# Altium PCB PekeeCarteArduino2.PcbDoc
Units mil, origin at the board's own origin, x right, y up, seen from the top; angles counter-clockwise.
Board outline 3620 x 3410 mil, 2 copper layers (Top Layer, Bottom Layer); 28 components, 0 nets, 260 pads, 0 vias.
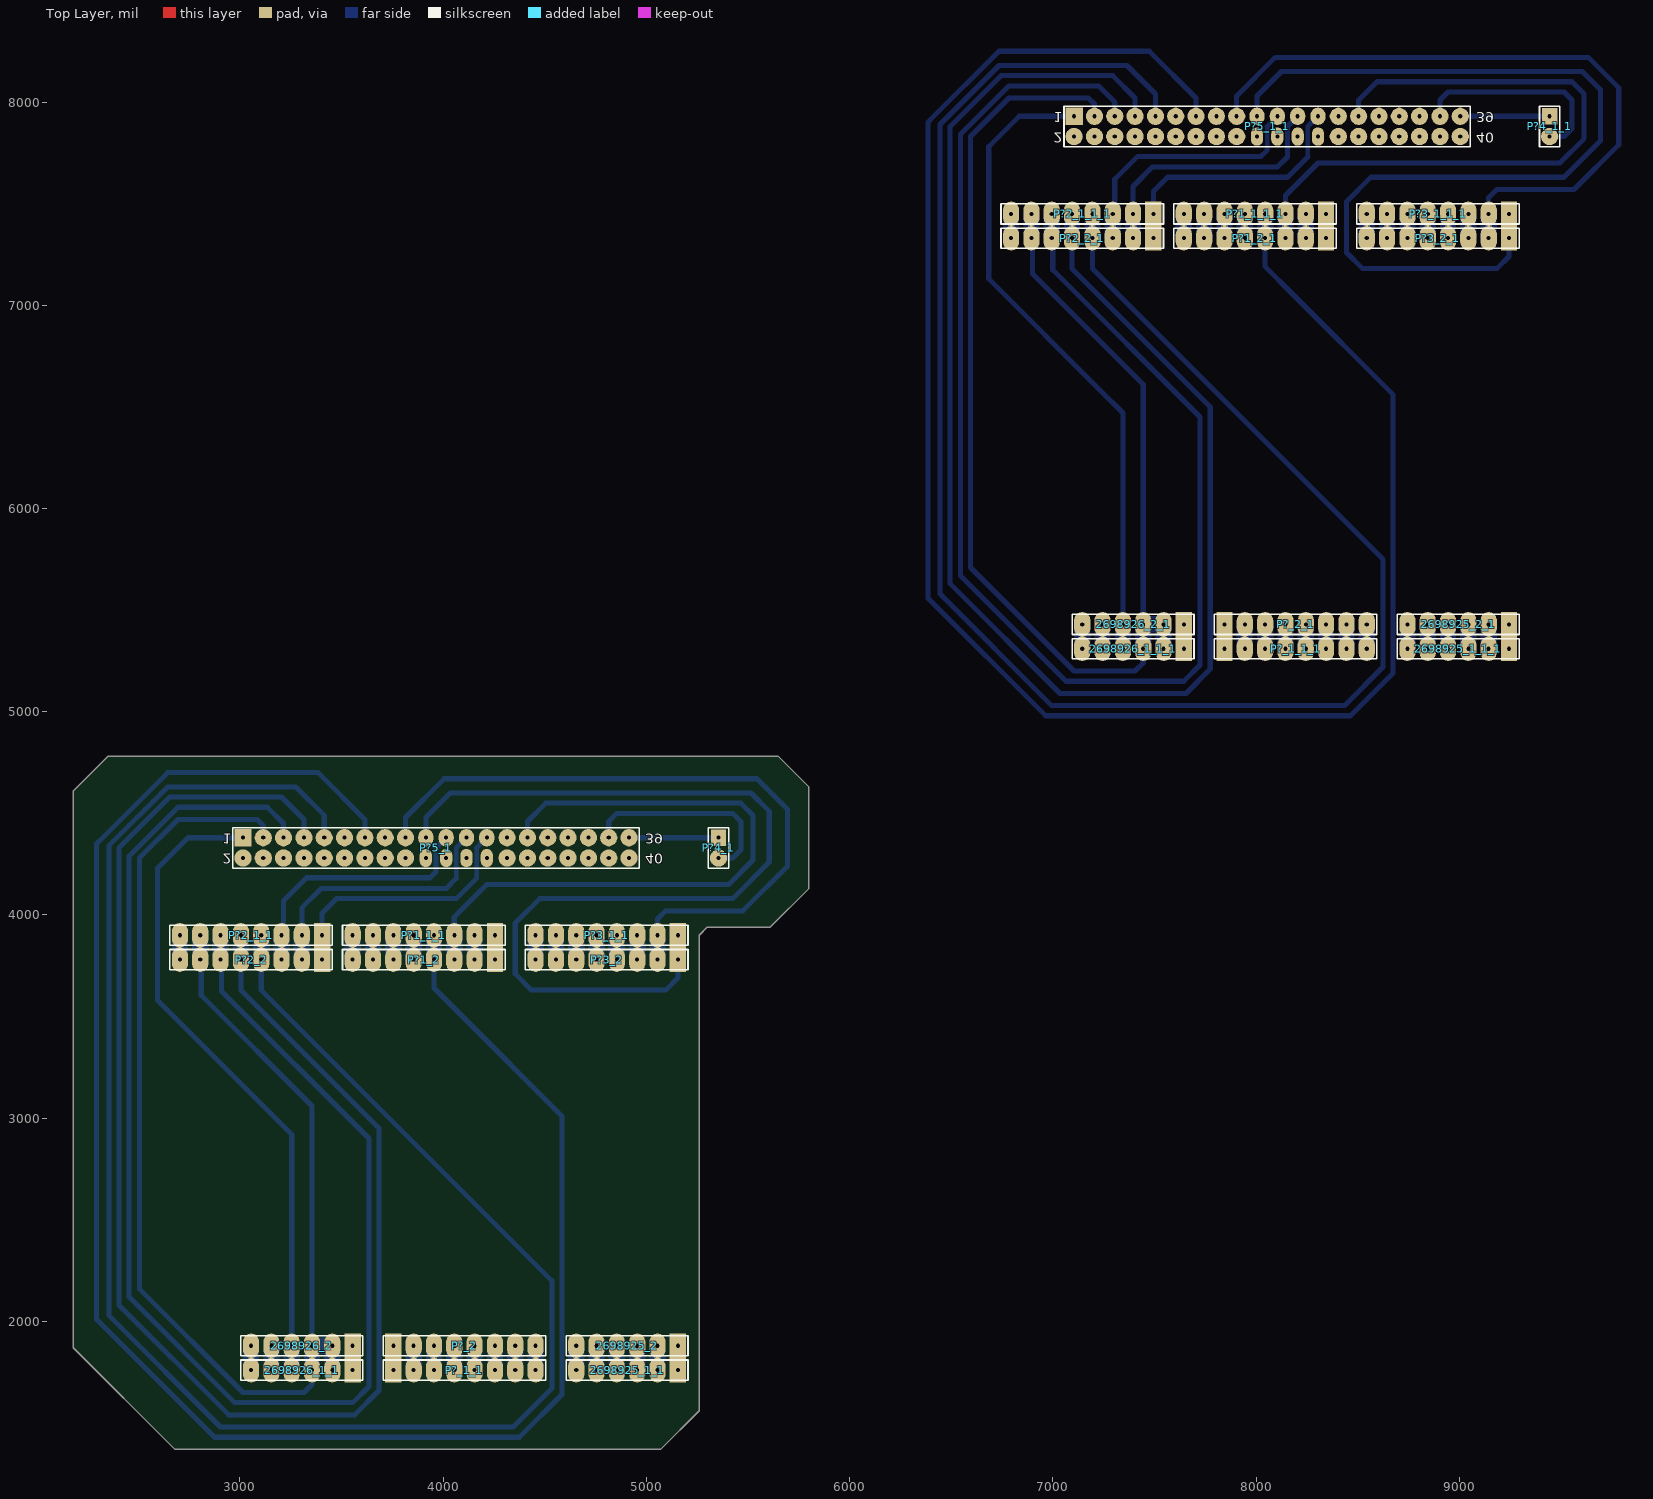
[diagram p0: Top Layer view]
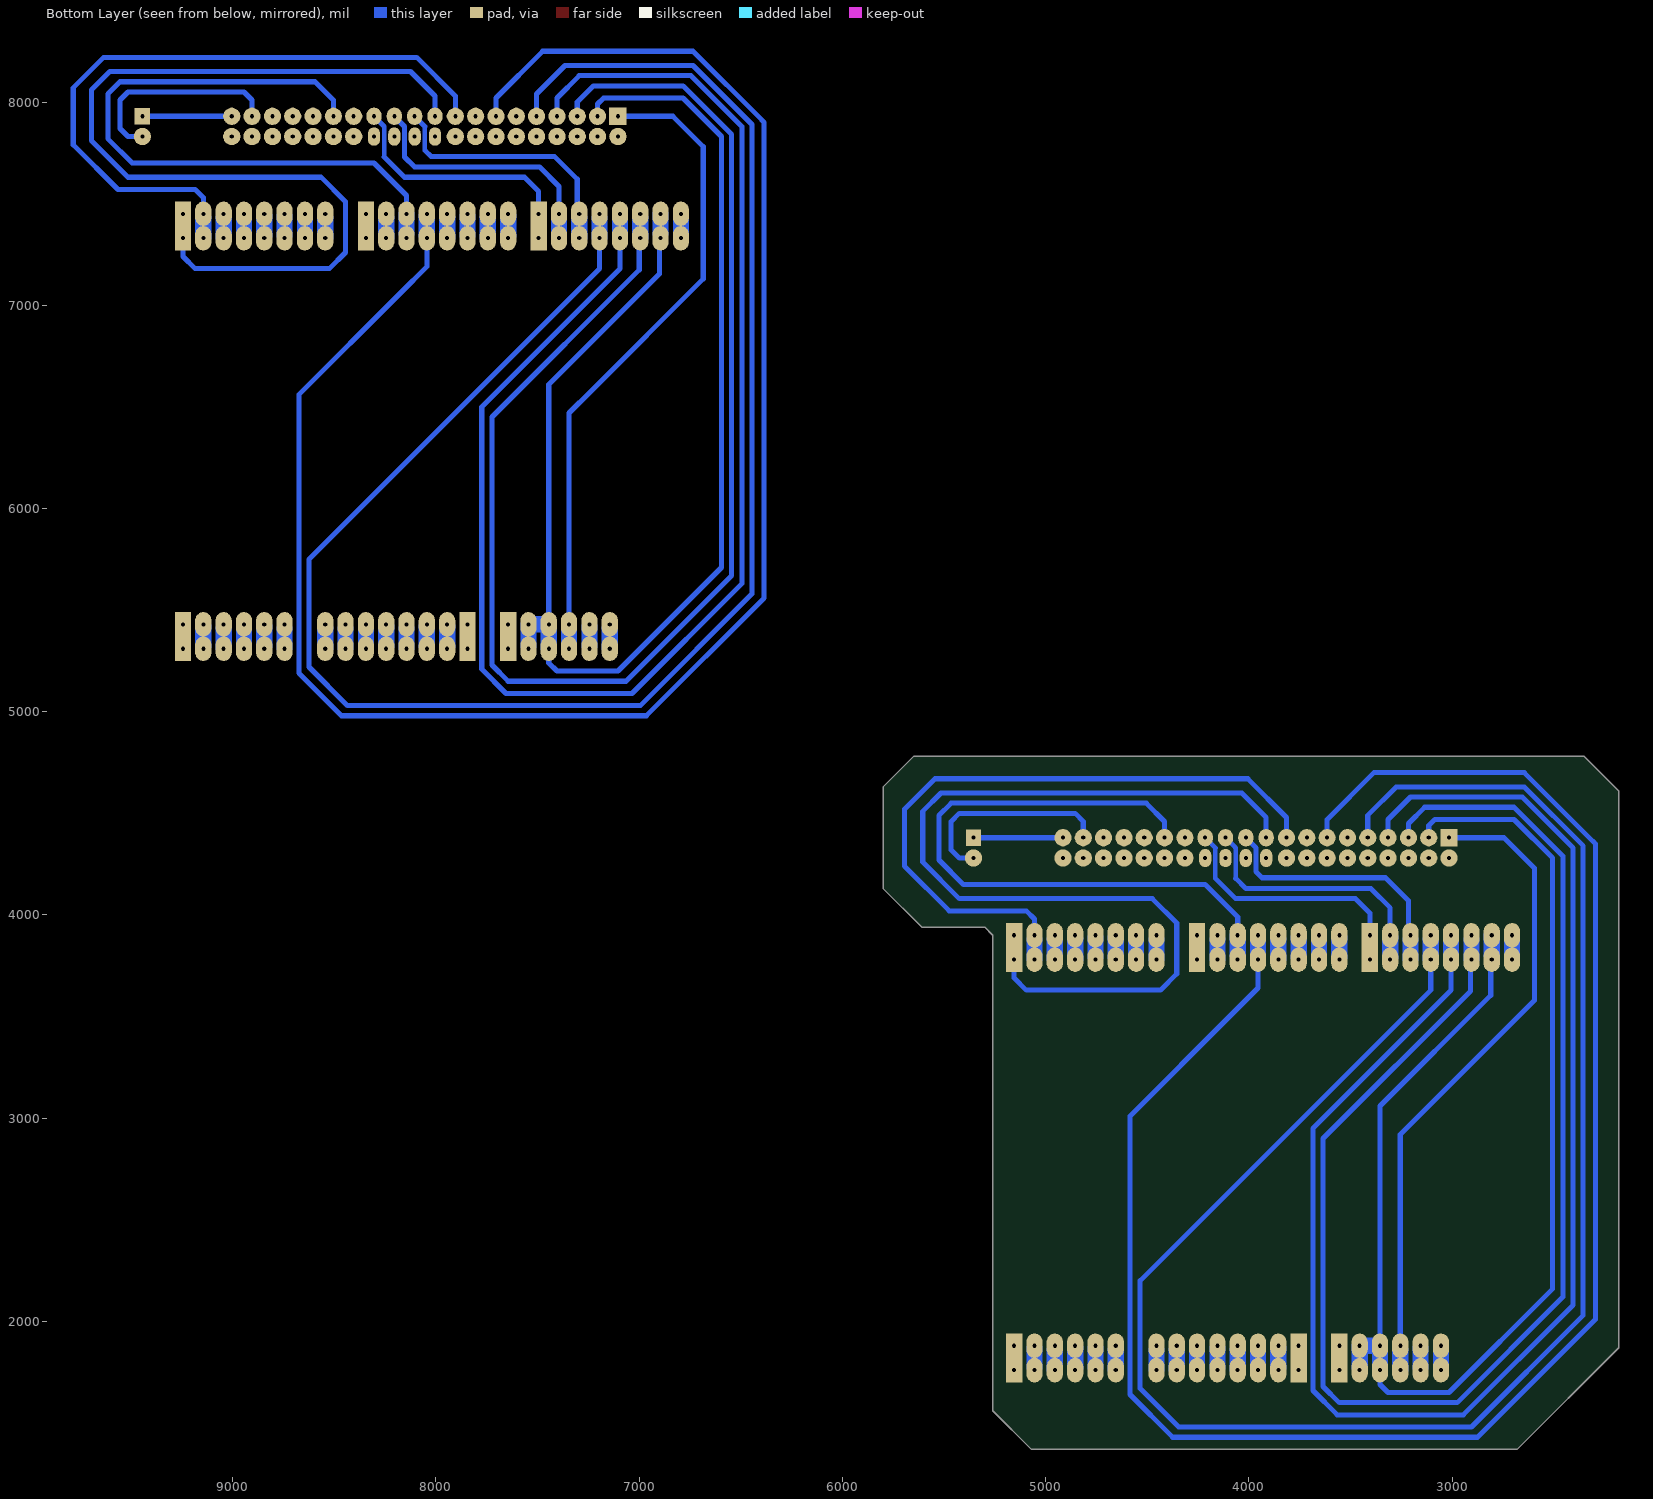
[diagram p1: Bottom Layer view, seen from below]

## Layer stack, top to bottom
Top Solder: solder mask 0.4, Solder Resist, Dk 3.5
Top Layer: signal copper 1.4
Dielectric 1: dielectric 12.6, FR-4, Dk 4.8
Bottom Layer: signal copper 1.4
Bottom Solder: solder mask 0.4, Solder Resist, Dk 3.5

## Board outline
2180,1870 2680,1370 5070,1370 5260,1560 5260,3900 5300,3940 5610,3940 5800,4130 5800,4630 5650,4780 2350,4780 2180,4610

## Design rules (kind name [scope] priority, off if disabled: settings)
AssemblyTestPointUsage [All] p1 off:
AssemblyTestpoint [All] p1 off: testpointundercomponent=TRUE minsize=40 maxsize=100 preferedsize=60 minholesize=0 maxholesize=40 preferedholesize=32 testpointgrid=1 usegrid=TRUE gridtolerance=0.01 allowsidetop=TRUE allowsidebottom=TRUE
Clearance [All] p1 off: gap=10
ComponentClearance [All] p1 off: gap=10 collisioncheckmode=3 verticalgap=10 showdistances=FALSE
DiffPairsRouting [All] p1 off: maxlimit=10 minlimit=10 mostfreqgap=10 toplayer_minwidth=15 toplayer_maxwidth=15 toplayer_prefwidth=15 bottomlayer_minwidth=15 bottomlayer_maxwidth=15 bottomlayer_prefwidth=15 maxuncoupledlength=500
FabricationTestPointUsage [All] p1 off: valid=0 allowmultiple=FALSE
FabricationTestpoint [All] p1 off: side=3 testpointundercomponent=TRUE minsize=40 maxsize=100 preferedsize=60 minholesize=0 maxholesize=40 preferedholesize=32 testpointgrid=1 allowsidetop=TRUE allowsidebottom=TRUE usegrid=TRUE gridtolerance=0.01
FanoutControl Fanout_BGA [IsBGA] p1 off: bgadir=Out bgaviamode=Centered fanoutstyle=Auto fanoutdirection=Alternating viagrid=1 // Fanout_BGA (Default Rule)
FanoutControl Fanout_LCC [IsLCC] p2 off: bgadir=Out bgaviamode=Centered fanoutstyle=Auto fanoutdirection=Alternating viagrid=1 // Fanout_LCC (Default Rule)
FanoutControl Fanout_SOIC [IsSOIC] p3 off: bgadir=Out bgaviamode=Centered fanoutstyle=Auto fanoutdirection=Alternating viagrid=1 // Fanout_SOIC (Default Rule)
FanoutControl Fanout_Small [(CompPinCount < 5)] p4 off: bgadir=Out bgaviamode=Centered fanoutstyle=Auto fanoutdirection=OutThenIn viagrid=1 // Fanout_Small (Default Rule)
FanoutControl Fanout_Default [All] p5 off: bgadir=Out bgaviamode=Centered fanoutstyle=Auto fanoutdirection=Alternating viagrid=1 // Fanout_Default (Default Rule)
Height [All] p1 off: minheight=0 maxheight=1000 prefheight=500
HoleSize [All] p1 off: absolutevalues=TRUE maxlimit=100 minlimit=1 maxpercent=80.000 minpercent=20.000
HoleToHoleClearance [All] p1 off: gap=10 allowstackedmicrovias=TRUE
LayerPairs [All] p1 off: enforce=TRUE
MinimumSolderMaskSliver [All] p1 off: minsoldermaskwidth=10
NetAntennae [All] p1 off: netantennaetolerance=0
PasteMaskExpansion [All] p1 off: expansion=0
PlaneClearance [All] p1 off: clearance=20
PlaneConnect [All] p1 off: planeconnectstyle=Relief reliefexpansion=20 reliefentries=4 reliefconductorwidth=10 reliefairgap=10
PolygonConnect [All] p1 off: connectstyle=Relief reliefconductorwidth=10 reliefentries=4 polygonreliefangle="90 Angle" airgapwidth=10
RoutingCorners [All] p1 off: cornerstyle=45-Degree minsetback=100 maxsetback=100
RoutingLayers [All] p1 off: top layer_v5=TRUE bottom layer_v5=TRUE
RoutingPriority [All] p1 off: routingpriority=0
RoutingTopology [All] p1 off: topology=Shortest
RoutingVias [All] p1 off: holewidth=28 width=50 viastyle="Through Hole" minholewidth=28 minwidth=50 maxholewidth=28 maxwidth=50
ShortCircuit [All] p1 off: allowed=FALSE
SilkToBoardRegionClearance [All] p1 off:
SilkToSilkClearance [All] p1 off: silktosilkclearance=10
SilkToSolderMaskClearance [IsPad] p1 off: minsilkscreentomaskgap=10 clearancetoexposedcopper=TRUE
SolderMaskExpansion [All] p1 off: expansion=4
UnRoutedNet [All] p1 off:
Width [All] p1 off: maxlimit=10 minlimit=10 preferedwidth=10

## Components (designator, comment, footprint, x,y, rotation, side; value= is the part's Value field where it differs from the comment)
2698925_1_1 "Header 6" HDR1X6 5155,1760 r180 top (schematic designator 2698925)
2698925_1_1_1 "Header 6" HDR1X6 9245,5310 r180 top (schematic designator 2698925)
2698925_2 "Header 6" HDR1X6 5155,1880 r180 top (schematic designator 2698925)
2698925_2_1 "Header 6" HDR1X6 9245,5430 r180 top (schematic designator 2698925)
2698926_1_1 "Header 6" HDR1X6 3555,1760 r180 top (schematic designator 2698925)
2698926_1_1_1 "Header 6" HDR1X6 7645,5310 r180 top (schematic designator 2698925)
2698926_2 "Header 6" HDR1X6 3555,1880 r180 top (schematic designator 2698925)
2698926_2_1 "Header 6" HDR1X6 7645,5430 r180 top (schematic designator 2698925)
P?1_1_1 "Header 8" HDR1X8 4255,3900 r180 top (schematic designator P?)
P?1_1_1_1 "Header 8" HDR1X8 8345,7450 r180 top (schematic designator P?)
P?1_2 "Header 8" HDR1X8 4255,3780 r180 top (schematic designator P?)
P?1_2_1 "Header 8" HDR1X8 8345,7330 r180 top (schematic designator P?)
P?2_1_1 "Header 8" HDR1X8 3405,3900 r180 top (schematic designator P?)
P?2_1_1_1 "Header 8" HDR1X8 7495,7450 r180 top (schematic designator P?)
P?2_2 "Header 8" HDR1X8 3405,3780 r180 top (schematic designator P?)
P?2_2_1 "Header 8" HDR1X8 7495,7330 r180 top (schematic designator P?)
P?3_1_1 "Header 8" HDR1X8 5155,3900 r180 top (schematic designator P?)
P?3_1_1_1 "Header 8" HDR1X8 9245,7450 r180 top (schematic designator P?)
P?3_2 "Header 8" HDR1X8 5155,3780 r180 top (schematic designator P?)
P?3_2_1 "Header 8" HDR1X8 9245,7330 r180 top (schematic designator P?)
P?4_1 "Header 2" HDR1X2 5355,4380 r270 top (schematic designator P?)
P?4_1_1 "Header 2" HDR1X2 9445,7930 r270 top (schematic designator P?)
P?5_1 "Header 20X2" HDR2X20 3015,4380 r0 top (schematic designator P?)
P?5_1_1 "Header 20X2" HDR2X20 7105,7930 r0 top (schematic designator P?)
P?_1_1 "Header 8" HDR1X8 3755,1760 r0 top (schematic designator P?)
P?_1_1_1 "Header 8" HDR1X8 7845,5310 r0 top (schematic designator P?)
P?_2 "Header 8" HDR1X8 3755,1880 r0 top (schematic designator P?)
P?_2_1 "Header 8" HDR1X8 7845,5430 r0 top (schematic designator P?)

## Footprints (in the part's own frame and the unit in brackets; to place one, negate y for a bottom-side part, rotate by r counter-clockwise, add the part's x,y. Pads: shape width x height; smd on the part's side, far side on the other; paste and mask are expansions set on the pad)
HDR1X2 [mil] "Connector; Header; 2 Position"
  rect 80x75 hole 20: 1(0,0)
  round 85 hole 20 unplated: 2(100,0)
  silkscreen extent -50,-50 150,50
HDR1X6 [mil] "Connector; Header; 6 Position"
  rect 80x120 hole 20: 1(0,0)
  oval 80x120 hole 20: 2(100,0) 3(200,0) 4(300,0) 5(400,0) 6(500,0)
  silkscreen extent -50,-50 550,50
HDR1X8 [mil] "Connector; Header; 8 Position"
  rect 80x120 hole 20: 1(0,0)
  oval 80x120 hole 20: 2(100,0) 3(200,0) 4(300,0) 5(400,0) 6(500,0) 7(600,0) 8(700,0)
  silkscreen extent -50,-50 750,50
HDR2X20 [mil] "Connector; Header; 20x2 Position"
  rect 85x85 hole 20 unplated: 1(0,0)
  round 85 hole 20 unplated: 2(0,-100) 3(100,0) 4(100,-100) 5(200,0) 6(200,-100) 7(300,0) 8(300,-100) 9(400,0) 10(400,-100) 11(500,0) 12(500,-100) 13(600,0) 14(600,-100) 15(700,0) 16(700,-100) 17(800,0) 18(800,-100) 27(1300,0) 28(1300,-100) 29(1400,0) 30(1400,-100) 31(1500,0) 32(1500,-100) 33(1600,0) 34(1600,-100) 35(1700,0) 36(1700,-100) 37(1800,0) 38(1800,-100) 39(1900,0) 40(1900,-100)
  oval 75x85 hole 20: 19(900,0) 21(1000,0) 23(1100,0) 25(1200,0)
  oval 60x90 hole 20: 20(900,-100) 22(1000,-100) 24(1100,-100) 26(1200,-100)
  silkscreen extent -50,-150 1950,50

## Part data
2698925_1_1 2698925_1_1_1 2698925_2 2698925_2_1 2698926_1_1 2698926_1_1_1 2698926_2 2698926_2_1: "Header, 6-Pin"
P?1_1_1 P?1_1_1_1 P?1_2 P?1_2_1 P?2_1_1 P?2_1_1_1 P?2_2 P?2_2_1 P?3_1_1 P?3_1_1_1 P?3_2 P?3_2_1 P?_1_1 P?_1_1_1 P?_2 P?_2_1: "Header, 8-Pin"
P?4_1 P?4_1_1: "Header, 2-Pin"
P?5_1 P?5_1_1: "Header, 20-Pin, Dual row"

## Nets (pads, with @x,y where several pads share a name; then routed paths per layer and width w, separated by ;. In a path a pad name is that pad's centre, name@x,y a point inside that pad or via, vN(x,y) a via of type N, cw(c..) or ccw(c..) an arc to the next point about the centre after c; other vN are vias at no path point)
pads on no net: 2698925_1_1.1 2698925_1_1.2 2698925_1_1.3 2698925_1_1.4 2698925_1_1.5 2698925_1_1.6 2698925_1_1_1.1 2698925_1_1_1.2 2698925_1_1_1.3 2698925_1_1_1.4 2698925_1_1_1.5 2698925_1_1_1.6 2698925_2.1 2698925_2.2 2698925_2.3 2698925_2.4 2698925_2.5 2698925_2.6 2698925_2_1.1 2698925_2_1.2 2698925_2_1.3 2698925_2_1.4 2698925_2_1.5 2698925_2_1.6 2698926_1_1.1 2698926_1_1.2 2698926_1_1.3 2698926_1_1.4 2698926_1_1.5 2698926_1_1.6 2698926_1_1_1.1 2698926_1_1_1.2 2698926_1_1_1.3 2698926_1_1_1.4 2698926_1_1_1.5 2698926_1_1_1.6 2698926_2.1 2698926_2.2 2698926_2.3 2698926_2.4 2698926_2.5 2698926_2.6 2698926_2_1.1 2698926_2_1.2 2698926_2_1.3 2698926_2_1.4 2698926_2_1.5 2698926_2_1.6 P?1_1_1.1 P?1_1_1.2 P?1_1_1.3 P?1_1_1.4 P?1_1_1.5 P?1_1_1.6 P?1_1_1.7 P?1_1_1.8 P?1_1_1_1.1 P?1_1_1_1.2 P?1_1_1_1.3 P?1_1_1_1.4 P?1_1_1_1.5 P?1_1_1_1.6 P?1_1_1_1.7 P?1_1_1_1.8 P?1_2.1 P?1_2.2 P?1_2.3 P?1_2.4 P?1_2.5 P?1_2.6 P?1_2.7 P?1_2.8 P?1_2_1.1 P?1_2_1.2 P?1_2_1.3 P?1_2_1.4 P?1_2_1.5 P?1_2_1.6 P?1_2_1.7 P?1_2_1.8 P?2_1_1.1 P?2_1_1.2 P?2_1_1.3 P?2_1_1.4 P?2_1_1.5 P?2_1_1.6 P?2_1_1.7 P?2_1_1.8 P?2_1_1_1.1 P?2_1_1_1.2 P?2_1_1_1.3 P?2_1_1_1.4 P?2_1_1_1.5 P?2_1_1_1.6 P?2_1_1_1.7 P?2_1_1_1.8 P?2_2.1 P?2_2.2 P?2_2.3 P?2_2.4 P?2_2.5 P?2_2.6 P?2_2.7 P?2_2.8 P?2_2_1.1 P?2_2_1.2 P?2_2_1.3 P?2_2_1.4 P?2_2_1.5 P?2_2_1.6 P?2_2_1.7 P?2_2_1.8 P?3_1_1.1 P?3_1_1.2 P?3_1_1.3 P?3_1_1.4 P?3_1_1.5 P?3_1_1.6 P?3_1_1.7 P?3_1_1.8 P?3_1_1_1.1 P?3_1_1_1.2 P?3_1_1_1.3 P?3_1_1_1.4 P?3_1_1_1.5 P?3_1_1_1.6 P?3_1_1_1.7 P?3_1_1_1.8 P?3_2.1 P?3_2.2 P?3_2.3 P?3_2.4 P?3_2.5 P?3_2.6 P?3_2.7 P?3_2.8 P?3_2_1.1 P?3_2_1.2 P?3_2_1.3 P?3_2_1.4 P?3_2_1.5 P?3_2_1.6 P?3_2_1.7 P?3_2_1.8 P?4_1.1 P?4_1.2 P?4_1_1.1 P?4_1_1.2 P?5_1.1 P?5_1.2 P?5_1.3 P?5_1.4 P?5_1.5 P?5_1.6 P?5_1.7 P?5_1.8 P?5_1.9 P?5_1.10 P?5_1.11 P?5_1.12 P?5_1.13 P?5_1.14 P?5_1.15 P?5_1.16 P?5_1.17 P?5_1.18 P?5_1.19 P?5_1.20 P?5_1.21 P?5_1.22 P?5_1.23 P?5_1.24 P?5_1.25 P?5_1.26 P?5_1.27 P?5_1.28 P?5_1.29 P?5_1.30 P?5_1.31 P?5_1.32 P?5_1.33 P?5_1.34 P?5_1.35 P?5_1.36 P?5_1.37 P?5_1.38 P?5_1.39 P?5_1.40 P?5_1_1.1 P?5_1_1.2 P?5_1_1.3 P?5_1_1.4 P?5_1_1.5 P?5_1_1.6 P?5_1_1.7 P?5_1_1.8 P?5_1_1.9 P?5_1_1.10 P?5_1_1.11 P?5_1_1.12 P?5_1_1.13 P?5_1_1.14 P?5_1_1.15 P?5_1_1.16 P?5_1_1.17 P?5_1_1.18 P?5_1_1.19 P?5_1_1.20 P?5_1_1.21 P?5_1_1.22 P?5_1_1.23 P?5_1_1.24 P?5_1_1.25 P?5_1_1.26 P?5_1_1.27 P?5_1_1.28 P?5_1_1.29 P?5_1_1.30 P?5_1_1.31 P?5_1_1.32 P?5_1_1.33 P?5_1_1.34 P?5_1_1.35 P?5_1_1.36 P?5_1_1.37 P?5_1_1.38 P?5_1_1.39 P?5_1_1.40 P?_1_1.1 P?_1_1.2 P?_1_1.3 P?_1_1.4 P?_1_1.5 P?_1_1.6 P?_1_1.7 P?_1_1.8 P?_1_1_1.1 P?_1_1_1.2 P?_1_1_1.3 P?_1_1_1.4 P?_1_1_1.5 P?_1_1_1.6 P?_1_1_1.7 P?_1_1_1.8 P?_2.1 P?_2.2 P?_2.3 P?_2.4 P?_2.5 P?_2.6 P?_2.7 P?_2.8 P?_2_1.1 P?_2_1.2 P?_2_1.3 P?_2_1.4 P?_2_1.5 P?_2_1.6 P?_2_1.7 P?_2_1.8
copper on no net: | length 130913.2
  Bottom Layer w23: 3965,4213.03 3965,4330 ; 4065,4180 4065,4330 ; 4165,4180 4165,4330 ; 8055,7763.03 8055,7880 ; 8155,7730 8155,7880 ; 8255,7730 8255,7880
  Bottom Layer w25: 2810,3780 2810,3605 3355,3060 3355,1880 ; 2886.25,3870 2910,3846.25 2910,3717.5 2910,3625 3635,2900 3635,1680 3555,1600 2975,1600 2455,2120 2455,4290 2695,4530 3135,4530 3215,4450 3215,4380 ; 2985,3870 3005,3850 3005,3630 3685,2950 3685,2930 3685,1660 3565,1540 2945,1540 2405,2080 2405,4330 2655,4580 2705,4580 3205,4580 3315,4470 3315,4380 ; 3015,4380 2745,4380 2595,4230 2595,3580 3145,3030 3255,2920 3255,1942.5 ; 3045,1870 3055,1880 3055,1832.5 3055,1800 ; 3085,3870 3085,3830 3105,3810 3105,3630 4535,2200 4535,1670 4345,1480 2905,1480 2355,2030 2355,4340 2645,4630 3275,4630 3415,4490 3415,4380 ; 3115,4380 3115,4440 3085,4470 2695,4470 2505,4280 2505,2160 3015,1650 3315,1650 3355,1690 3355,1800 3355,1880 ; 3155,1800 3155,1847.5 3155,1880 ; 3205,3780 3205,3830 3215,3840 3215,4070 3328.03,4183.03 3935,4183.03 3965,4213.03 ; 3236.59,1898.41 3255,1880 ; 3245,1890 3255,1880 ; 3255,1780 3255,1880 ; 3255,1870 3255,1940 ; 3285,3780 3285,3810 ; 3305,3835 3305,4035 3400,4130 4015,4130 4065,4180 ; 3405,3780 3405,3800 3405,4010 3475,4080 4065,4080 4165,4180 ; 3455,1790 3455,1880 ; 3455,1870 3445,1880 3355,1880 ; 3555,3770 3555,3860 ; 3615,4380 3615,4470 3385,4700 2645,4700 2305,4360 2295,4350 2295,2010 2875,1430 4375,1430 4585,1640 4585,3010 4085,3510 3955,3640 3955,3780 3955,3860 ; 3655,3770 3655,3860 ; 3755,3780 3755,3860 ; 3815,4380 3815,4480 4005,4670 4835,4670 ; 3855,1800 3855,1847.5 3855,1880 ; 3855,3770 3855,3860 ; 3915,4380 3915,4480 4035,4600 4845,4600 ; 3929.62,3754.62 3934.25,3750 ; 3955,1800 3955,1847.5 3955,1880 ; 3965,4330 4015,4380 4015,4410 ; 4055,1800 4055,1847.5 4055,1880 ; 4055,3770 4055,3860 4055,3930 ; 4055,3912.5 4055,3990 4215,4150 4845,4150 ; 4065,4330 4115,4380 ; 4155,1800 4155,1847.5 4155,1880 ; 4155,3762.18 4155,3860 ; 4165,4330 4215,4380 4215,4390 ; 4255,1800 4255,1847.5 4255,1880 ; 4355,1800 4355,1847.5 4355,1880 ; 4415,4380 4415,4460 4505,4550 4845,4550 ; 4455,1800 4455,1847.5 4455,1880 ; 4455,3770 4455,3860 ; 4555,3780 4555,3860 ; 4655,1800 4655,1847.5 4655,1880 ; 4655,3762.18 4655,3860 ; 4755,1800 4755,1847.5 4755,1880 ; 4755,3770 4755,3860 ; 4755,4150 5405,4150 5525,4270 5525,4490 5465,4550 4765,4550 ; 4755,4670 5545,4670 5695,4520 5695,4240 5475,4020 5095,4020 5055,3980 5055,3912.5 ; 4765,4600 5515,4600 5605,4510 5605,4260 5425,4080 4825,4080 ; 4815,4380 4815,4460 4855,4500 5425,4500 5465,4460 5465,4320 5425,4280 5355,4280 ; 4855,1800 4855,1847.5 4855,1880 ; 4855,3770 4855,3860 ; 4895,4380 5355,4380 ; 4905,4080 4475,4080 4355,3960 4355,3710 4435,3630 5095,3630 5155,3690 5155,3780 ; 4915,4380 4975,4380 ; 4955,1800 4955,1847.5 4955,1880 ; 4955,3770 4955,3860 ; 5055,1800 5055,1847.5 5055,1880 ; 5055,3770 5055,3860 5055,3960 ; 6900,7330 6900,7155 7445,6610 7445,5430 ; 6976.25,7420 7000,7396.25 7000,7267.5 7000,7175 7725,6450 7725,5230 7645,5150 7065,5150 6545,5670 6545,7840 6785,8080 7225,8080 7305,8000 7305,7930 ; 7075,7420 7095,7400 7095,7180 7775,6500 7775,6480 7775,5210 7655,5090 7035,5090 6495,5630 6495,7880 6745,8130 6795,8130 7295,8130 7405,8020 7405,7930 ; 7105,7930 6835,7930 6685,7780 6685,7130 7235,6580 7345,6470 7345,5492.5 ; 7135,5420 7145,5430 7145,5382.5 7145,5350 ; 7175,7420 7175,7380 7195,7360 7195,7180 8625,5750 8625,5220 8435,5030 6995,5030 6445,5580 6445,7890 6735,8180 7365,8180 7505,8040 7505,7930 ; 7205,7930 7205,7990 7175,8020 6785,8020 6595,7830 6595,5710 7105,5200 7405,5200 7445,5240 7445,5350 7445,5430 ; 7245,5350 7245,5397.5 7245,5430 ; 7295,7330 7295,7380 7305,7390 7305,7620 7418.03,7733.03 8025,7733.03 8055,7763.03 ; 7326.59,5448.41 7345,5430 ; 7335,5440 7345,5430 ; 7345,5330 7345,5430 ; 7345,5420 7345,5490 ; 7375,7330 7375,7360 ; 7395,7385 7395,7585 7490,7680 8105,7680 8155,7730 ; 7495,7330 7495,7350 7495,7560 7565,7630 8155,7630 8255,7730 ; 7545,5340 7545,5430 ; 7545,5420 7535,5430 7445,5430 ; 7645,7320 7645,7410 ; 7705,7930 7705,8020 7475,8250 6735,8250 6395,7910 6385,7900 6385,5560 6965,4980 8465,4980 8675,5190 8675,6560 8175,7060 8045,7190 8045,7330 8045,7410 ; 7745,7320 7745,7410 ; 7845,7330 7845,7410 ; 7905,7930 7905,8030 8095,8220 8925,8220 ; 7945,5350 7945,5397.5 7945,5430 ; 7945,7320 7945,7410 ; 8005,7930 8005,8030 8125,8150 8935,8150 ; 8019.62,7304.62 8024.25,7300 ; 8045,5350 8045,5397.5 8045,5430 ; 8055,7880 8105,7930 8105,7960 ; 8145,5350 8145,5397.5 8145,5430 ; 8145,7320 8145,7410 8145,7480 ; 8145,7462.5 8145,7540 8305,7700 8935,7700 ; 8155,7880 8205,7930 ; 8245,5350 8245,5397.5 8245,5430 ; 8245,7312.18 8245,7410 ; 8255,7880 8305,7930 8305,7940 ; 8345,5350 8345,5397.5 8345,5430 ; 8445,5350 8445,5397.5 8445,5430 ; 8505,7930 8505,8010 8595,8100 8935,8100 ; 8545,5350 8545,5397.5 8545,5430 ; 8545,7320 8545,7410 ; 8645,7330 8645,7410 ; 8745,5350 8745,5397.5 8745,5430 ; 8745,7312.18 8745,7410 ; 8845,5350 8845,5397.5 8845,5430 ; 8845,7320 8845,7410 ; 8845,7700 9495,7700 9615,7820 9615,8040 9555,8100 8855,8100 ; 8845,8220 9635,8220 9785,8070 9785,7790 9565,7570 9185,7570 9145,7530 9145,7462.5 ; 8855,8150 9605,8150 9695,8060 9695,7810 9515,7630 8915,7630 ; 8905,7930 8905,8010 8945,8050 9515,8050 9555,8010 9555,7870 9515,7830 9445,7830 ; 8945,5350 8945,5397.5 8945,5430 ; 8945,7320 8945,7410 ; 8985,7930 9445,7930 ; 8995,7630 8565,7630 8445,7510 8445,7260 8525,7180 9185,7180 9245,7240 9245,7330 ; 9005,7930 9065,7930 ; 9045,5350 9045,5397.5 9045,5430 ; 9045,7320 9045,7410 ; 9145,5350 9145,5397.5 9145,5430 ; 9145,7320 9145,7410 9145,7510
  Bottom Layer w80: 2705,3792.18 2705,3890 ; 2805,3802.18 2805,3900 ; 2905,3782.18 2905,3880 ; 3005,3782.18 3005,3880 ; 3055,1762.17 3055,1860 ; 3105,3782.18 3105,3880 ; 3155,1772.17 3155,1870 ; 3205,3782.18 3205,3880 ; 3255,1762.17 3255,1860 ; 3305,3792.18 3305,3890 ; 3355,1762.17 3355,1860 ; 3355,1880 3455,1880 ; 3455,1772.17 3455,1870 ; 3555,3792.18 3555,3890 ; 3655,3782.18 3655,3880 ; 3755,3792.18 3755,3890 ; 3855,1772.17 3855,1870 ; 3855,3782.18 3855,3880 ; 3955,1772.17 3955,1870 ; 3955,3792.18 3955,3890 ; 4055,1762.17 4055,1860 ; 4055,3802.18 4055,3900 ; 4155,1772.17 4155,1870 ; 4155,3782.18 4155,3880 ; 4255,1772.17 4255,1870 ; 4355,1762.17 4355,1860 ; 4455,1762.17 4455,1860 ; 4455,3782.18 4455,3880 ; 4555,3792.18 4555,3890 ; 4655,1762.17 4655,1860 ; 4655,3792.18 4655,3890 ; 4755,1772.17 4755,1870 ; 4755,3792.18 4755,3890 ; 4855,1772.17 4855,1870 ; 4855,3782.18 4855,3880 ; 4955,1762.17 4955,1860 ; 4955,3782.18 4955,3880 ; 5055,1772.17 5055,1870 ; 5055,3782.18 5055,3880 ; 6795,7342.18 6795,7440 ; 6895,7352.18 6895,7450 ; 6995,7332.18 6995,7430 ; 7095,7332.18 7095,7430 ; 7145,5312.18 7145,5410 ; 7195,7332.18 7195,7430 ; 7245,5322.18 7245,5420 ; 7295,7332.18 7295,7430 ; 7345,5312.18 7345,5410 ; 7395,7342.18 7395,7440 ; 7445,5312.18 7445,5410 ; 7445,5430 7545,5430 ; 7545,5322.18 7545,5420 ; 7645,7342.18 7645,7440 ; 7745,7332.18 7745,7430 ; 7845,7342.18 7845,7440 ; 7945,5322.18 7945,5420 ; 7945,7332.18 7945,7430 ; 8045,5322.18 8045,5420 ; 8045,7342.18 8045,7440 ; 8145,5312.18 8145,5410 ; 8145,7352.18 8145,7450 ; 8245,5322.18 8245,5420 ; 8245,7332.18 8245,7430 ; 8345,5322.18 8345,5420 ; 8445,5312.18 8445,5410 ; 8545,5312.18 8545,5410 ; 8545,7332.18 8545,7430 ; 8645,7342.18 8645,7440 ; 8745,5312.18 8745,5410 ; 8745,7342.18 8745,7440 ; 8845,5322.18 8845,5420 ; 8845,7342.18 8845,7440 ; 8945,5322.18 8945,5420 ; 8945,7332.18 8945,7430 ; 9045,5312.18 9045,5410 ; 9045,7332.18 9045,7430 ; 9145,5322.18 9145,5420 ; 9145,7332.18 9145,7430

## Silkscreen, mask and mechanical layers (free items; w line width, h text height)
Mechanical 1:
  lines w10: 2180,1870 2680,1370 5070,1370 5260,1560 5260,3900 5300,3940 5610,3940 5800,4130 5800,4630 5650,4780 2350,4780 2180,4610 2180,1870 ; 6270,5420 6270,8160 6440,8330 9740,8330 9890,8180 9890,7680 9700,7490 9390,7490 9350,7450 9350,5110 9160,4920 6770,4920 6270,5420

## Text inside footprints (layer, text, board x,y; h text height)
P?5_1: Top Overlay "39" at 4995,4400 h50 r180; Top Overlay "40" at 4995,4300 h50 r180; Top Overlay "2" at 2915,4300 h50 r180; Top Overlay "1" at 2915,4400 h50 r180
P?5_1_1: Top Overlay "39" at 9085,7950 h50 r180; Top Overlay "40" at 9085,7850 h50 r180; Top Overlay "2" at 7005,7850 h50 r180; Top Overlay "1" at 7005,7950 h50 r180